# Altium PCB TSALpcb.PcbDoc
Units mil, origin at the board's own origin, x right, y up, seen from the top; angles counter-clockwise.
Board outline 4250 x 2015 mil, 2 copper layers (Top Layer, Bottom Layer); 25 components, 21 nets, 73 pads, 1 vias.
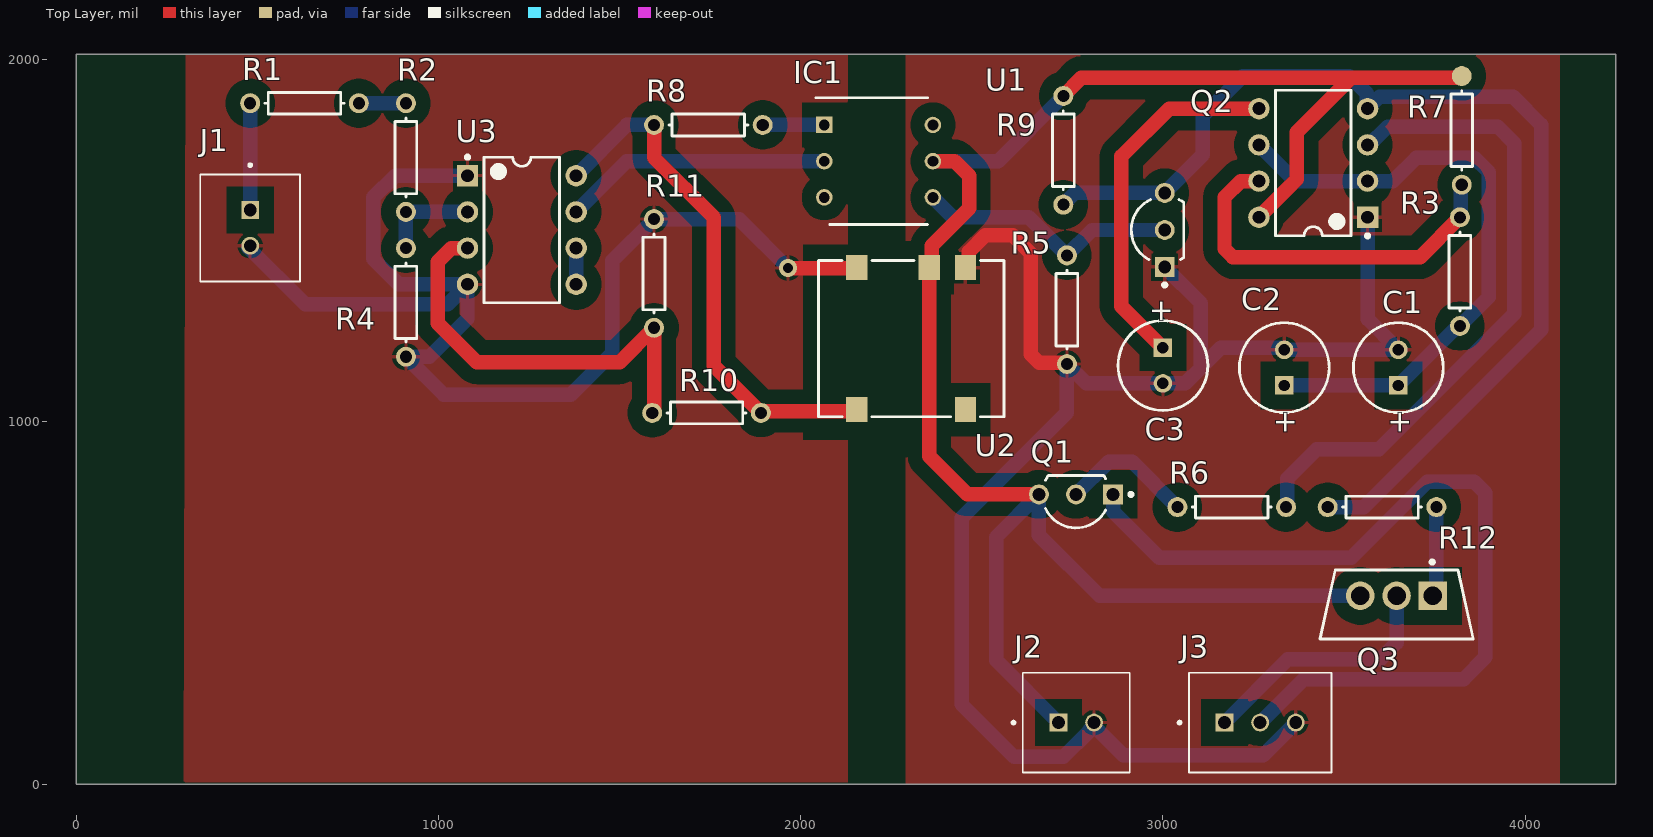
[diagram p0: Top Layer view]
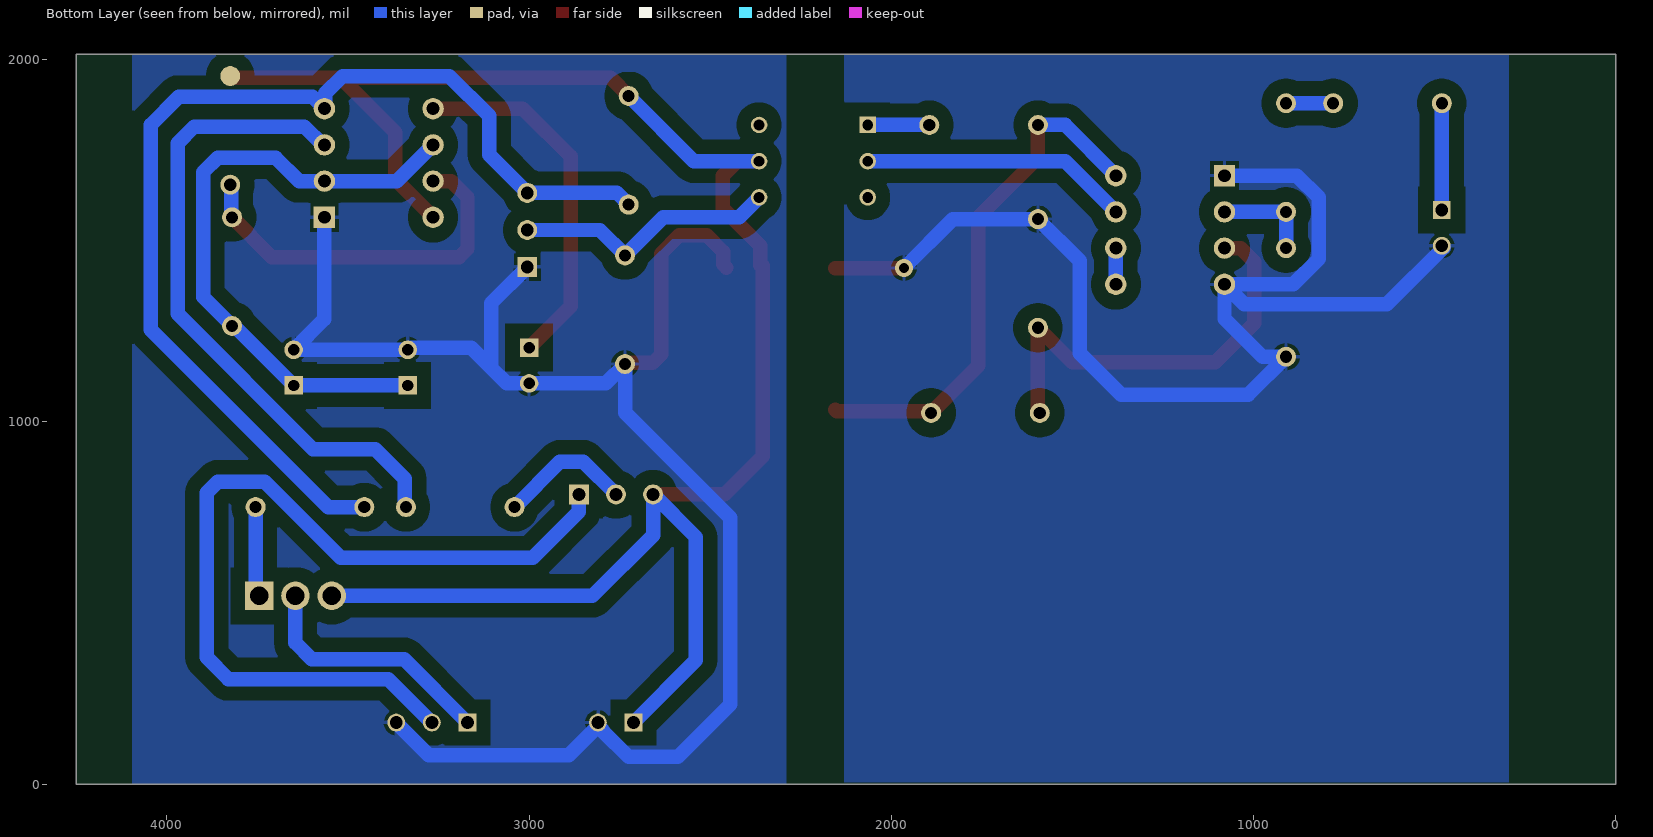
[diagram p1: Bottom Layer view, seen from below]

## Layer stack, top to bottom
Top Solder: solder mask 0.4, Solder Resist, Dk 3.5
Top Layer: signal copper 1.4
Dielectric 1: dielectric 12.6, FR-4, Dk 4.8
Bottom Layer: signal copper 1.4
Bottom Solder: solder mask 0.4, Solder Resist, Dk 3.5

## Board outline
0,0 4250,0 4250,2015 0,2015

## Design rules (kind name [scope] priority, off if disabled: settings)
Clearance HV_poly [InNamedPolygon('HV Ground')] p1: gap=40 ignorepadtopadclearanceinfootprint=FALSE
Clearance GLV_poly_2 [InNamedPolygon('GLV Ground')] p2: gap=40 ignorepadtopadclearanceinfootprint=FALSE
Clearance GLV_poly_1 [InNamedPolygon('HV Ground')] p3: gap=40 ignorepadtopadclearanceinfootprint=FALSE
Clearance GLV_poly [InNamedPolygon('GLV Ground')] p4: gap=40 ignorepadtopadclearanceinfootprint=FALSE
Clearance polygon_clearance [InPolygon] p5: gap=20 ignorepadtopadclearanceinfootprint=FALSE
Clearance [All] p6: gap=10 ignorepadtopadclearanceinfootprint=FALSE except(0: Arc-Hole Track-Hole SMDPad-Hole THPad-Hole Via-Hole Fill-Hole Poly-Hole Region-Hole Text-Hole)
PolygonConnect [All] p1: connectstyle=Relief reliefconductorwidth=10 reliefentries=4 polygonreliefangle="90 Angle" airgapwidth=10
RoutingVias [All] p1: holewidth=28 width=50 viastyle="Through Hole" minholewidth=28 minwidth=50 maxholewidth=28 maxwidth=50
SolderMaskExpansion [All] p1: expansion=4 istentingtop=FALSE
Width [All] p1: maxlimit=40 minlimit=10 preferedwidth=10 minimp=50.000000 maximp=50.000000 favimp=50.000000
30 further rules are at their usual default settings.

## Components (designator, comment, footprint, x,y, rotation, side; value= is the part's Value field where it differs from the comment)
C1 "ECA-1HM470" CAPPR55-250-1120X630X1220 3650,1150 r90 top value=1µF
C2 "ECA-1HM470" CAPPR55-250-1120X630X1220 3335,1150 r90 top value=1µF
C3 "ECA-1HM470" CAPPR55-250-1120X630X1220 3000,1155.79 r270 top value=100nF
IC1 "4N35" DIP762W56P254L864H508Q6N 2215,1720 r0 top
J1 "2132415-2" TE_2132415-2 480,1585 r90 top
J2 "2132415-2" TE_2132415-2 2711.57,170 r180 top
J3 "2132415-3" TE_2132415-3 3170,170 r180 top
Q1 "2N7000" ONSC-TO-92-3-29-11_AM_BL 2760,800 r180 top
Q2 "2N7000" ONSC-TO-92-3-29-11_AM_BL 3005,1530 r90 top
Q3 "IRF4905PBF" FP-PG-TO220-3-MFG 3645,495.98 r270 top
R1 "Res1" AXIAL-0.3#1 630,1880 r180 top value=100K
R2 "Res1" AXIAL-0.3#1 910,1730 r90 top value=100K
R3 "Res1" AXIAL-0.3#1 3820,1415 r90 top value=100K
R4 "Res1" AXIAL-0.3#1 910,1330 r90 top value=10K
R5 "Res1" AXIAL-0.3#1 2735,1310 r90 top value=10K
R6 "Res1" AXIAL-0.3#1 3190,765 r180 top value=10K
R7 "Res1" AXIAL-0.3#2 3825,1805 r90 top value=10K
R8 "Res1" AXIAL-0.3#1 1745,1820 r0 top value=2.2K
R9 "Res1" AXIAL-0.3#1 2725,1750 r90 top value=22K
R10 "Res1" AXIAL-0.3#1 1740,1025 r0 top value=5K
R11 "Res1" AXIAL-0.3#1 1595,1410 r270 top value=5K
R12 "Res1" AXIAL-0.3#1 3605,765 r0 top value=10K
U1 "NE555P" P0008A 3415,1715 r180 top
U2 "12Vin, 5Vout" SMT-8 2305,1230 r180 top
U3 "LM311P" P0008A 1230,1530 r0 top

## Footprints (in the part's own frame and the unit in brackets; to place one, negate y for a bottom-side part, rotate by r counter-clockwise, add the part's x,y. Pads: shape width x height; smd on the part's side, far side on the other; paste and mask are expansions set on the pad)
AXIAL-0.3#1 [mm] "Axial Device, Thru-Hole; 2 Leads; 0.3 in Pin Spacing"
  round 1.4 hole 0.85: 1(-3.81,0) 2(3.81,0)
  silkscreen extent -2.77,-0.76 2.77,0.76
AXIAL-0.3#2 [mm] "Axial Device, Thru-Hole; 2 Leads; 0.3 in Pin Spacing"
  round 1.4 hole 0.85: 1(-3.81,0)
  round 1.4 all layers, no hole: 2(3.81,0)
  silkscreen extent -2.77,-0.76 2.77,0.76
CAPPR55-250-1120X630X1220 [mm] "THD, 2-Leads, Dia 6.3mm, Pin Spacing 2.5mm"
  rect 1.3x1.3 hole 0.8: 1(-1.25,0)
  round 1.3 hole 0.8: 2(1.25,0)
  silkscreen extent -3.15,-3.15 3.15,3.15, body extent -3.15,-3.15 3.16,3.15, height 12.21
DIP762W56P254L864H508Q6N [mm]
  rect 1.16x1.16 hole 0.76: 1(-3.81,2.54)
  round 1.16 hole 0.76: 2(-3.81,0) 3(-3.81,-2.54) 4(3.81,-2.54) 5(3.81,0) 6(3.81,2.54)
  silkscreen extent -4.39,-4.44 3.43,4.44, body extent -3.95,-4.32 3.95,4.32, height 5.08
FP-PG-TO220-3-MFG [mm]
  rect 2x2 hole 1.3 paste-1000 mask+0: 1(-0.61,2.54)
  round 2 hole 1.3 paste-1000 mask+0: 2(-0.61,0) 3(-0.61,-2.54)
  silkscreen extent -3.1,-5.37 2.41,5.37, body extent -2.51,-5.48 2.51,5.48, height 0.25
ONSC-TO-92-3-29-11_AM_BL [mm] "TO, 3-Leads, Body Dia 4.7mm, Pitch 2.6mm"
  rect 1.4x1.4 hole 0.9: 1(-2.6,0)
  round 1.4 hole 0.9: 2(0,0) 3(2.6,0)
  silkscreen extent -3.98,-1.34 2.13,2.35, body extent -2.84,-1.34 2.84,2.35, height 5.33
P0008A [mm] "DIP, 8-Leads, Body 10.15x6.6mm, Pitch 2.54mm"
  rect 1.5x1.5 hole 0.9: 1(-3.81,3.81)
  round 1.5 hole 0.9: 2(-3.81,1.27) 3(-3.81,-1.27) 4(-3.81,-3.81) 5(3.81,-3.81) 6(3.81,-1.27) 7(3.81,1.27) 8(3.81,3.81)
  silkscreen extent -3.94,-5.1 2.65,5.23, body extent -3.95,-5.07 3.95,5.07, height 5.08
SMT-8 [mm] "Fixed Isolated Module, SMT-8, body 12.75x10.7mm"
  rect 1.5x1.75 smd paste-403.566: 1(-3.81,-4.975) 2(-1.27,-4.975) 4(3.81,-4.975) 5(3.81,4.975) 8(-3.81,4.975)
  silkscreen extent -6.5,-5.48 6.5,5.48, body extent -6.34,-5.57 6.41,5.53, height 6.95
TE_2132415-2 [mm]
  rect 1.25x1.25 hole 0.9: 1(0,0)
  round 1.25 hole 0.9: 2(-2.5,0)
  silkscreen extent -5,-3.5 3.25,3.5
TE_2132415-3 [mm]
  rect 1.25x1.25 hole 0.9: 1(0,0)
  round 1.25 hole 0.9: 2(-2.5,0) 3(-5,0)
  silkscreen extent -7.5,-3.5 3.25,3.5

## Part data
C1 C2 C3: library part CMP-001-00031-6, "Aluminum Electrolytic Capacitor, 47 uF, +/-20%, 50 V, -40 to 85 degC, 2-Pin THD, RoHS, Bulk", Capacitor Type=Electrolytic, Case/Package=Radial, Manufacturer=Panasonic, Max Operating Temperature=85°C, Min Operating Temperature=-40°C, Package Description="2-Pin Radial Lead, Dia 6.3 mm, Height 12.2 mm", Package Quantity=200, Package Reference=CAPPR55-250-1120X630X1220, Ripple Current=130mA, Tolerance=20%, Voltage Rating=50V, Datasheet URL=https://industrial.panasonic.com/cdbs/www-data/pdf/RDF0000/DMF0000COL72.pdf, Datasheet Version=Apr-16, Diameter=6.3mm, Lead Pitch=2.5mm, Manufacturer URL=http://www.panasonic.com/, Mounting Technology=TH, Packaging=Bulk, Pins=2, Ripple Current (AC)=130mA, RoHS Compliant=True
IC1: "Integrated Circuit", Manufacturer_Name="ON Semiconductor", Mouser Part Number=512-4N35, Datasheet Link=https://eu.mouser.com/datasheet/2/308/Fairchild%20Semiconductor_4n25-28_35-37_h11a1-a5-1190949.pdf, Height=5.08mm, Manufacturer_Part_Number=4N35, Mouser Price/Stock=https://www.mouser.co.uk/ProductDetail/ON-Semiconductor-Fairchild/4N35?qs=9h%252BT%2FFFCxR8I%2FJMe3yKdFg%3D%3D
J1 J2: "Conn Shrouded Header HDR 2 POS 2.5mm Solder ST Thru-Hole Bag/Box", Package=None, Centerline_Pitch="2.5 mm[.098 in]", Check_prices=https://www.snapeda.com/parts/2132415-2/TE%20Connectivity%20AMP%20Connectors/view-part/2233226/?ref=eda, Digi-Key_Part_Number=A101065-ND, MF="TE Connectivity", MP=2132415-2, Number_of_Positions=2, Product_Type=Connector, Purchase-URL=https://pricing.snapeda.com/search/part/2132415-2/?ref=eda, SnapEDA_Link=https://www.snapeda.com/parts/2132415-2/TE%20Connectivity%20AMP%20Connectors/view-part/2233226/?ref=snap
J3: "Conn Shrouded Header HDR 3 POS 2.5mm Solder ST Thru-Hole Bag/Box", Package=None, Availability=Unavailable, Centerline_Pitch="2.5 mm[.098 in]", MF="TE Connectivity", MP=2132415-3, Number_of_Positions=3, Price=None, Product_Type=Connector, SnapEDA_Link=https://www.snapeda.com/parts/2132415-3/TE%20Connectivity%20AMP%20Connectors/view-part/2469125/?ref=snap, TE_purchase_URL=https://www.te.com/usa-en/product-2132415-3.html?te_bu=Cor&te_type=disp&te_campaign=seda_glo_cor-seda-global-disp-prtnr-fy19-seda-model-bom-cta_sma-317_1&elqCampaignId=32493
Q1 Q2: library part CMP-013-00020-3, "Small Signal MOSFET, 200 mA, 60 V, N-Channel, 3-Pin TO-92, Bulk Box", Case/Package=TO-92, Input Capacitance=50pF, Manufacturer="Fairchild Semiconductor", Max Operating Temperature=150°C, Min Operating Temperature=-55°C, Nominal Dual Supply Voltage=60V, Package Description="3-Pin Transistor Outline, Body 4.825 x 3.685 mm, Pitch 1.27 mm", Package Quantity=2000, Package Reference=TO-92-3-29-11_AM_BL, Package Version="Rev. AM", Power=400mW, Datasheet URL=http://www.onsemi.com/pub_link/Collateral/2N7000-D.PDF, Datasheet Version="Rev. 8, 04/2011", Elements=1, Mounting Technology=TH, Nominal Vgs=2.1V, Packaging=Bulk, Pins=3, Rds On Max=5Ohm, RoHS Compliant=True
Q3: library part CMP-32901-000200-1, "MOSFET P-CH 55V 74A TO-220AB", Case/Package=TO-220, Continuous Drain Current (ID)=74A, Drain to Source Breakdown Voltage=-55V, Drain to Source Resistance=20mR, Gate to Source Voltage (Vgs)=20V, Input Capacitance=3.4nF, Max Operating Temperature=175°C, Max Power Dissipation=200W, Min Operating Temperature=-55°C, Threshold Voltage=-4V, Drain to Source Voltage (Vdss)=-55V, Element Configuration=Single, Halogen Free="Halogen Free", Height=0.6inch, Lead Free="Lead Free", Length=0.414inch, Max Dual Supply Voltage=-55V, Mount="Through Hole", Number of Pins=3, Packaging=Rail/Tube, Power Dissipation=200W, Rds On Max=20mR, REACH SVHC="No SVHC", RoHS Compliant=Yes, Turn-Off Delay Time=61ns, Turn-On Delay Time=18ns, Width=0.185inch
R1 R2 R3 R4 R5 R6 R7 R8 R9 R10 R11 R12: "Resistor", LatestRevisionDate=17-Jul-2002, LatestRevisionNote="Re-released for DXP Platform.", PackageDescription="Axial Device, Thru-Hole; 2 Leads; 0.3 in Pin Spacing", PackageReference=AXIAL-0.3, Published=8-Jun-2000, Publisher="Altium Limited"
U1: library part CMP-2000-04954-1, "Precision Timer, 4.5 to 16 V, 0 to 70 degC, 8-Pin DIP, Pb-Free, Tube", Manufacturer=TexasInstruments, Maximum High Level Output Current=-200mA, Maximum Low Level Output Current=200mA, Operating Supply Voltage=5, Package=8PDIP, Package Description="8-Pin Double In-line Package, Body 9.59 x 6.35 mm, Pitch 2.54 mm", Package Reference=P8, Category=Timer, Datasheet URL=http://www.ti.com/general/docs/lit/getliterature.tsp?genericPartNumber=NE555&fileType=pdf, Datasheet Version="Rev. I, 09/2014", Manufacturer URL=http://www.ti.com/, Number of Internal Timers=1, Package URL=http://www.ti.com/lit/ml/mpdi001b/mpdi001b.pdf, Packaging=Rail/Tube, Rad Hard=No, Type=Standard
U2: library part 176920522, "MagI3C-FISM Fixed Isolated SIP Module, SMT-8, 12Vin, 5Vout", Input Voltage=12V, Isolation Voltage=2000V, Operating Temperature="-40 to +100degC", Output Voltage=5V, ComponentLink1Description=Manufacturer, ComponentLink1URL=http://www.we-online.de, ComponentLink2Description=Datasheet, ComponentLink2URL=https://katalog.we-online.de/pm/datasheet/176920522.pdf, Mounting Technology=SMT, Packaging="Tape and Reel", Part Number=176920522, Published Date="October 2019", Publisher="Wurth Elektronik", Size=SMT-8
U3: library part CMP-014-00015-1, "Quad Differential Comparator, 3.5 to 30 V, 0 to 70 degC, 8-Pin PDIP (P), Pb-Free (RoHS), Tube", Case/Package=PDIP, Manufacturer="Texas Instruments (TI)", Max Dual Supply Voltage=15V, Max Operating Temperature=70°C, Max Supply Voltage=30V, Min Dual Supply Voltage=1.75V, Min Operating Temperature=0°C, Min Supply Voltage=3.5V, Nominal Dual Supply Voltage=12V, Nominal Supply Current=7.5mA, Nominal Voltage Gain=106.02dB, Package Description="8-Pin Double In-line Package, Body 9.59 x 6.35 mm, Pitch 2.54 mm", Package Quantity=50, Package Reference=P0008A, Package Version="4040082/E, 04/2010", Channels=1, Datasheet URL=http://www.ti.com/general/docs/lit/getliterature.tsp?genericPartNumber=LM311&fileType=pdf, Datasheet Version="SLCS007I, 06/2015", Elements=1, Manufacturer URL=http://www.ti.com/, Mounting Technology=TH, Nominal Supply Voltage=12V, Package URL=http://www.ti.com/lit/ml/mpdi001b/mpdi001b.pdf, Packaging=Rail/Tube, Pins=8, Propagation Delay=115ns, RoHS Compliant=True

## Via types
v1: diameter 50, hole 28, Top Layer to Bottom Layer, 1 vias

## Nets (pads, with @x,y where several pads share a name; then routed paths per layer and width w, separated by ;. In a path a pad name is that pad's centre, name@x,y a point inside that pad or via, vN(x,y) a via of type N, cw(c..) or ccw(c..) an arc to the next point about the centre after c; other vN are vias at no path point)
NetC1_1: C1.1 C2.1 R3.1 U1.2 U1.6 | length 1731.1
  Bottom Layer w40: U1.6 3365,1665 U1.2 3635,1665 3700,1730 3860,1730 3900,1690 3900,1345 R3.1 3814.21,1265 C1.1 C2.1
NetC1_2: C1.2 C2.2 C3.2 J2.2 J3.3 Q2.1 R5.1 U1.1 U2.1 | length 4504.2
  Top Layer w40: U2.1 2464.53,1435.39 2464.53,1469.53 2510,1515 2585,1515 2635,1465 2635,1186.32 2658.43,1162.89 2732.11,1162.89 R5.1
  Bottom Layer w40: J2.2@2810,160 2890,80 3276.85,80 J3.3 ; J2.2 2810,162.1 2796.39,148.48 2796.39,146.39 2725,75 2590,75 2445,220 2445,735 2735,1025 R5.1 2788.43,1106.57 C3.2 3061.57,1106.57 3105,1150 ; Q2.1 3105,1327.64 3105,1150 ; 3160,1205 3105,1150 ; 3161,1205 3329.21,1205 C2.2 C1.2 3565,1284.21 U1.1
NetC3_1: C3.1 U1.5 | length 1010.3
  Top Layer w40: C3.1 2885,1320 2885,1733 3017,1865 U1.5
NetIC1_1: IC1.1 R8.2 | length 172.1
  Bottom Layer w10: R8.2@1895,1815 R8.2@1900,1820
  Bottom Layer w40: R8.2@1900,1820 IC1.1
NetIC1_2: IC1.2 U3.7 | length 743
  Bottom Layer w40: U3.7 1520,1720 IC1.2
NetIC1_4: IC1.4 Q2.2 R5.2 | length 735.3
  Bottom Layer w40: IC1.4 2420,1565 2630,1565 R5.2 2805,1530 Q2.2
NetIC1_5: IC1.5 J2.1 Q1.3 Q3.3 R7.2 R9.2 U1.8 U2.2 | length 5148.2
  Top Layer w40: U2.2@2355,1430.79 U2.2 ; IC1.5 2425,1720 2465,1680 2465,1590 2361.74,1486.74 2361.74,1432.61 U2.2 ; Q1.3 2460,800 2355,905 U2.2 ; R9.2 2775,1950 3520,1950 ; U1.8 3370,1670 3370,1800 3520,1950 ; R7.2@3820,1950 3520,1950
  Bottom Layer w40: IC1.5 2545,1720 R9.2 ; J2.1 2540,341.57 2540,682.36 Q1.3 2657.64,687.36 2825,520 Q3.3
NetJ1_1: J1.1 R1.2 | length 295
  Bottom Layer w40: J1.1 R1.2
NetJ1_2: J1.2 R4.1 R11.1 U2.4 U3.1 U3.4 | length 3440
  Top Layer w20: U2.4@2154.13,1425 U2.4
  Top Layer w40: v1(1965,1425) U2.4@2154.13,1425
  Bottom Layer w40: J1.2@475,1481.57 631.57,1325 1025,1325 U3.4 ; U3.1 880,1680 820,1620 820,1450 890,1380 U3.4 ; v1(1965,1425) 1830,1560 R11.1 1480,1445 1480,1190 1365,1075 1015,1075 R4.1 975,1180 1080,1285 U3.4
NetJ3_1: J3.1 Q3.2 | length 696.1
  Bottom Layer w40: J3.1 3345,345 3600,345 3645,390 Q3.2
NetJ3_2: J3.2 Q1.1 | length 2378.4
  Bottom Layer w40: Q1.1 2862.36,752.64 2990,625 3520,625 3730,835 3860,835 3890,805 3890,350 3830,290 3388.43,290 J3.2
NetQ1_2: Q1.2 R6.2 | length 369.1
  Bottom Layer w40: Q1.2 2850,890 2915,890 R6.2
NetQ2_3: Q2.3 R9.1 R12.1 U1.4 | length 2994.3
  Bottom Layer w40: R9.1 2757.36,1632.36 Q2.3 3110,1737.36 3110,1845 3220,1955 3515,1955 3562.91,1907.09 3562.91,1867.09 U1.4 3565.52,1865 3597.96,1897.44 3967.56,1897.44 4045,1820 4045,1255 3555,765 R12.1
NetQ3_1: Q3.1 R12.2 | length 249.1
  Bottom Layer w20: Q3.1 Q3.1@3755,530
  Bottom Layer w40: Q3.1@3755,530 R12.2
NetR1_1: R1.1 R2.2 | length 130
  Bottom Layer w40: R1.1 R2.2
NetR2_1: R2.1 R4.2 U3.2 | length 270
  Bottom Layer w40: R4.2 R2.1 U3.2
NetR3_2: R3.2 R7.1 U1.7 | length 1052.5
  Top Layer w40: U1.7 3215,1665 3170,1620 3170,1478.43 3193.43,1455 3710,1455 R3.2
  Bottom Layer w40: R3.2 3822.5,1567.5 3822.5,1652.5 R7.1
NetR6_1: R6.1 U1.3 | length 1810.8
  Bottom Layer w40: R6.1 3342.89,767.89 3342.89,842.89 3425,925 3596.57,925 3970,1298.43 3970,1770 3925,1815 3620.16,1815 3570.16,1765 U1.3
NetR8_1: R8.1 R10.2 U2.5 U3.8 | length 1446.9
  Top Layer w40: R8.1 1595,1730 1760,1565 1760,1155 R10.2 ; R10.2@1900,1030 2150.87,1030 U2.5
  Bottom Layer w40: U3.8 1520,1820 R8.1
NetR10_1: R10.1 R11.2 U3.3 | length 1186.6
  Top Layer w40: U3.3 1035,1480 997.32,1442.32 997.32,1272.68 1105,1165 1500,1165 R11.2 1595,1030 R10.1
NetU3_5: U3.5 U3.6 | length 100
  Bottom Layer w40: U3.5 U3.6
pads on no net: IC1.3 IC1.6 U2.8

## Polygon pours and split planes (outlines as drawn)
NetJ1_2 on Top Layer "HV Ground" (solid, pour order 2): 2005,950 2130,950 2130,5 2005,5 297.11,5 302.03,2015 2130,2015 2130,1490 2005,1490
NetC1_2 on Top Layer "GLV Ground" (solid, pour order 3): 2290,2015 4095,2015 4095,0 2290,0
NetC1_2 on Bottom Layer "GLV Ground" (solid, pour order 5): 2290.07,2015 4095,2015 4095,0 2290.07,0
NetJ1_2 on Bottom Layer "HV Ground" (solid, pour order 4): 295,2015 2130,2015 2130,5 295,5

## Text inside footprints (layer, text, board x,y; h text height)
C1: Top Overlay "+" at 3679.53,964.97 h59.06 r90
C2: Top Overlay "+" at 3364.53,964.97 h59.06 r90
C3: Top Overlay "+" at 2970.47,1340.81 h59.06 r270